# Altium PCB uz_frontpanel_buttonboard.PcbDoc
Units mm, origin at the board's own origin, x right, y up, seen from the top; angles counter-clockwise.
Board outline 41 x 105.16 mm, 2 copper layers (Top Layer, Bottom Layer), stack 1.569 mm thick; 8 components, 15 nets, 32 pads, 0 vias.
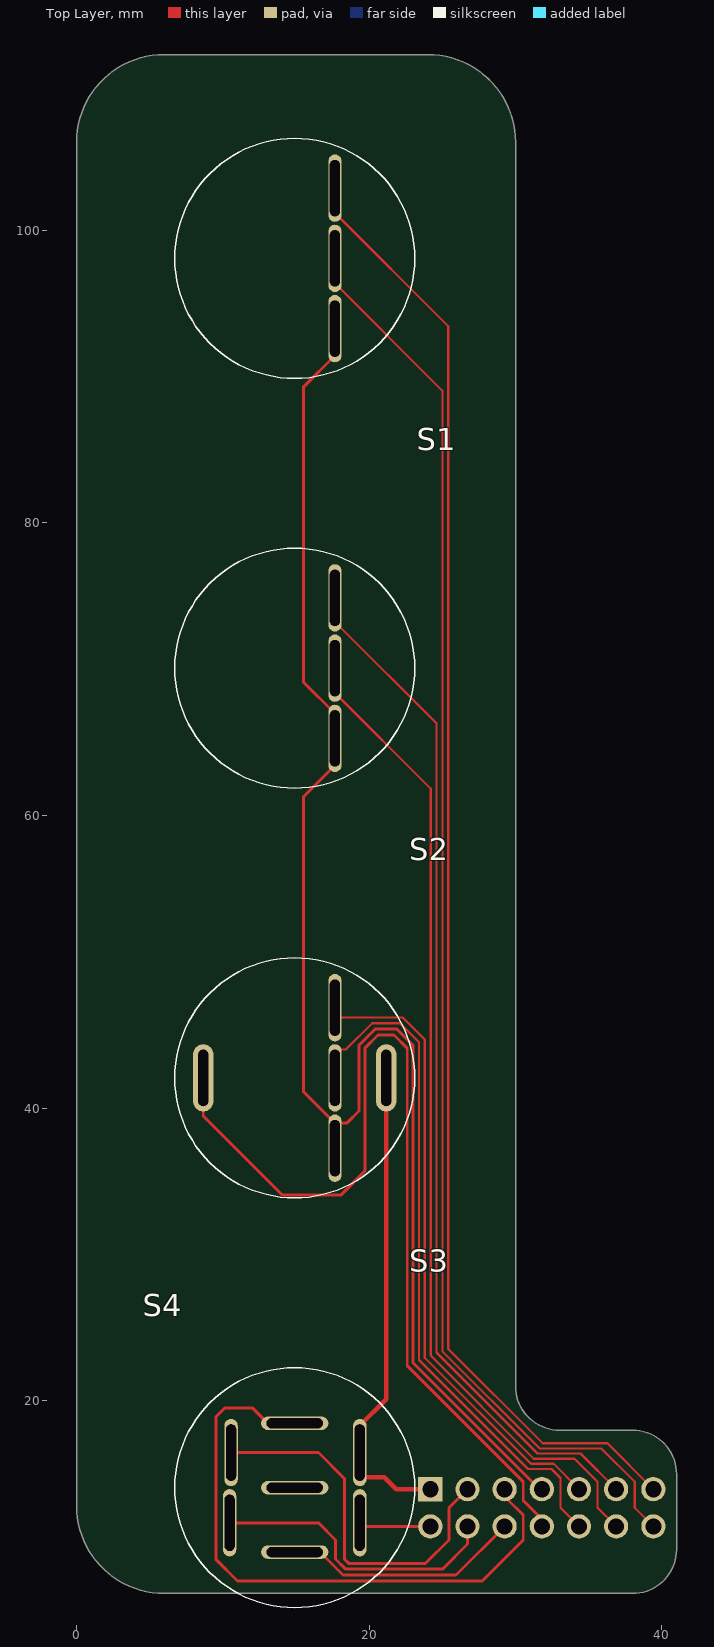
[diagram p0: Top Layer view]
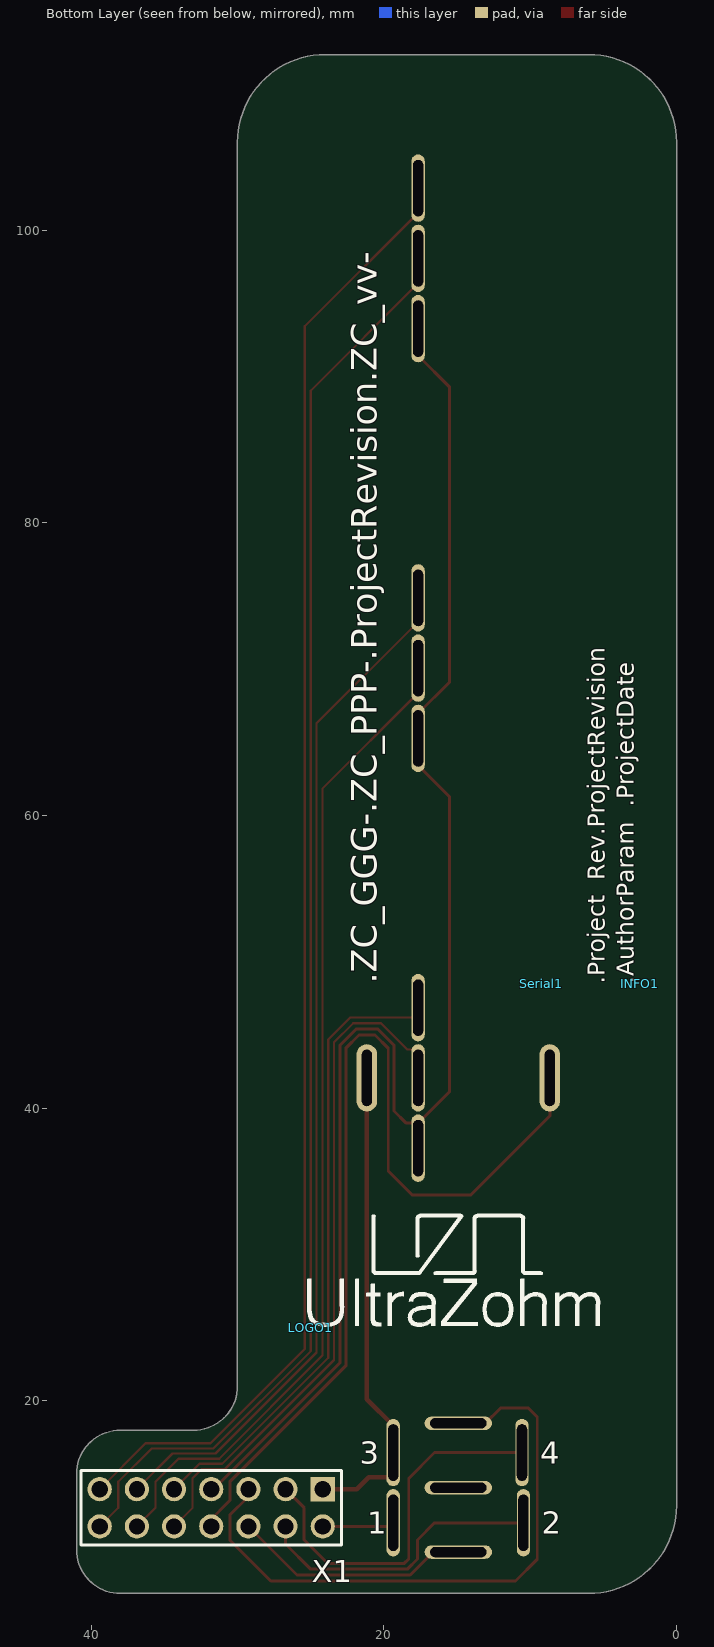
[diagram p1: Bottom Layer view, seen from below]

## Layer stack, top to bottom
Top Solder: solder mask 0.0254, SM-001, Dk 4
Top Layer: signal copper 0.035
Dielectric 1: core 1.4986, Core-043, Dk 4.3
Bottom Layer: signal copper 0.035
Bottom Solder: solder mask 0.0254, SM-001, Dk 4

## Board outline
0,12.84 0,25 0,106 cw(c6,106) 6,112 24,112 cw(c24,106) 30,106 30,21 ccw(c33,21) 33,18 38,18 cw(c38,15) 41,15 41,9.84 cw(c38,9.84) 38,6.84 6,6.84 cw(c6,12.84)

## Design rules (kind name [scope] priority, off if disabled: settings)
AssemblyTestPointUsage [InNetClass('3V3_SingleEnded') or InNetClass('5V_SingleEnded') or InNetClass('15V_SingleEnded') or InNetClass('DifferentialSignals')] p1:
BoardOutlineClearance [All] p1: gap=0.5 ignorepadtopadclearanceinfootprint=FALSE except(0: Arc-SplitContinuation Track-SplitContinuation SMDPad-SplitContinuation THPad-SplitContinuation Via-SplitContinuation Fill-SplitContinuation Poly-SplitContinuation Region-SplitContinuation Text-SplitContinuation)
Clearance [All] p1: gap=0.5 ignorepadtopadclearanceinfootprint=TRUE except(0.127: Arc-Arc Arc-Track Arc-SMDPad Arc-Fill Arc-Poly Arc-Region Track-Track SMDPad-SMDPad SMDPad-Fill SMDPad-Poly SMDPad-Region Fill-Fill Fill-Poly Fill-Region Poly-Region Region-Region; 0.2: Track-SMDPad Track-Fill Track-Poly Track-Region; 0.33: Arc-THPad Arc-Via Track-THPad Track-Via SMDPad-THPad SMDPad-Via Via-Fill Via-Poly Via-Region)
ComponentClearance [All] p1: gap=0.1 collisioncheckmode=3 verticalgap=0.1 showdistances=FALSE
FanoutControl Fanout_Power [InNetClass('Power') or InNet('ENABLE')] p1: bgadir=Out bgaviamode=Centered fanoutstyle=Auto fanoutdirection=None viagrid=0.025
FanoutControl Fanout_RS422 [InNetClass('DifferentialSignals')] p2: bgadir=Out bgaviamode=Closest fanoutstyle=Rows fanoutdirection=OutOnly viagrid=0.025
FanoutControl Fanout_BGA [IsBGA] p3 off: bgadir=Out bgaviamode=Centered fanoutstyle=Auto fanoutdirection=Alternating viagrid=0.025 // Fanout_BGA (Default Rule)
FanoutControl Fanout_LCC [IsLCC] p4 off: bgadir=Out bgaviamode=Centered fanoutstyle=Auto fanoutdirection=Alternating viagrid=0.025 // Fanout_LCC (Default Rule)
FanoutControl Fanout_SOIC [IsSOIC] p5 off: bgadir=Out bgaviamode=Centered fanoutstyle=Auto fanoutdirection=Alternating viagrid=0.025 // Fanout_SOIC (Default Rule)
FanoutControl Fanout_Small [(CompPinCount < 5)] p6 off: bgadir=Out bgaviamode=Centered fanoutstyle=Auto fanoutdirection=OutThenIn viagrid=0.025 // Fanout_Small (Default Rule)
FanoutControl Fanout_Default [All] p7: bgadir=NE bgaviamode=Closest fanoutstyle=Rows fanoutdirection=InOnly viagrid=0.025 // Fanout_Default (Default Rule)
Height [All] p1: minheight=0 maxheight=50 prefheight=12.7
HoleSize [All] p1: absolutevalues=TRUE maxlimit=4 minlimit=0.025 maxpercent=80.000 minpercent=20.000
PolygonConnect PolygonConnect_Therm [HoleSize > 2.6] p1: connectstyle=Direct reliefconductorwidth=0.254 reliefentries=4 polygonreliefangle="90 Angle" airgapwidth=0.254
PolygonConnect PolygonConnect_via [InPadClass('pad') or IsVia] p2: connectstyle=Direct reliefconductorwidth=0.254 reliefentries=4 polygonreliefangle="90 Angle" airgapwidth=0.254
PolygonConnect [All] p3: connectstyle=Relief reliefconductorwidth=0.3 reliefentries=4 polygonreliefangle="90 Angle" airgapwidth=0.25
RoutingLayers RoutingLayers_3V3Signals [InNetClass('3V3_SingleEnded')] p1 off: top layer_v5=TRUE bottom layer_v5=TRUE
RoutingLayers RoutingLayers_SingleEnded [InNetClass('15V_SingleEnded') or InNetClass('3V3_SingleEnded') or InNetClass('5V_SingleEnded')] p2 off: top layer_v5=TRUE bottom layer_v5=TRUE
RoutingLayers RoutingLayers_Differential [InNetClass('DifferentialSignals')] p3 off: top layer_v5=TRUE bottom layer_v5=FALSE
RoutingLayers [All] p4: top layer_v5=TRUE bottom layer_v5=TRUE
RoutingVias [All] p1: holewidth=0.3 width=0.5 viastyle="Through Hole" minholewidth=0.2 minwidth=0.4 maxholewidth=0.5 maxwidth=1
SolderMaskExpansion [All] p1: expansion=0.102 istentingtop=FALSE
UnRoutedNet UnRoutedNet_Signals [InNetClass('15V_SingleEnded') or InNetClass('3V3_SingleEnded') or InNetClass('5V_SingleEnded') or InNetClass('DifferentialSignals')] p1: checkbadconnections=TRUE
UnRoutedNet [All] p2: checkbadconnections=TRUE
Width [All] p1: maxlimit=10 minlimit=0.127 preferedwidth=0.3 minimp=50.000000 maximp=50.000000 favimp=50.000000
19 further rules are at their usual default settings.

## Components (designator, comment, footprint, x,y, rotation, side; value= is the part's Value field where it differs from the comment)
INFO1 "Design Information" Design_info2 2.5,48.5 r90 bottom
LOGO1 "UZ Logo" UZ_Logo_tiny 25,25 r180 bottom
S1 "P16-TF" P16-TF 14.91,98.07 r270 top
S2 "P16-TF" P16-TF 14.91,70.07 r270 top
S3 "P16-TF-R" P16-TF-R 14.91,42.07 r270 top
S4 "P16-TF-RGB" P16-TF-RGB 14.91,14.07 r0 top
Serial1 "ZC Serialnumber" ZC-Serial 9.25,48.5 r90 bottom value=GGG-PPP-VVvv
X1 "2.54-2*7P Pin Header" TSW-107-07-XXX-S 24.175,13.965 r0 bottom

## Footprints (in the part's own frame and the unit in brackets; to place one, negate y for a bottom-side part, rotate by r counter-clockwise, add the part's x,y. Pads: shape width x height; smd on the part's side, far side on the other; paste and mask are expansions set on the pad)
Design_info2 [mm] "project name + revision number"
P16-TF [mm]
  oval 4.6x0.916 hole 0.687 slot 3.844 at 0 deg: C(4.8,2.75) NC(-4.8,2.75) NO(0,2.75)
  silkscreen extent -8.2,-8.2 8.2,8.2, body extent -11.12,-9.25 10.82,9.75, height 5.25
P16-TF-R [mm]
  oval 4.6x1.4 hole 0.687 slot 3.844 at 0 deg: +(0,6.25) -(0,-6.25)
  oval 4.6x0.916 hole 0.687 slot 3.844 at 0 deg: C(4.8,2.75) NC(-4.8,2.75) NO(0,2.75)
  silkscreen extent -8.2,-8.2 8.2,8.2, body extent -10.97,-9.25 10.97,9.75, height 34
P16-TF-RGB [mm]
  oval 0.916x4.6 hole 0.687 slot 3.844 at 90 deg: 1(4.45,-2.4) 2(-4.45,-2.4) 3(4.45,2.4) 4(-4.35,2.4)
  oval 4.6x0.916 hole 0.687 slot 3.844 at 0 deg: C(0,-4.4) NC(0,4.4) NO(0,0)
  silkscreen extent -8.2,-8.2 8.2,8.2, body extent -9.5,-10.97 9.5,10.97, height 31.3
TSW-107-07-XXX-S [mm]
  rect 1.65x1.65 hole 1.1: 1(0,0)
  round 1.65 hole 1.1: 2(0,2.54) 3(2.54,0) 4(2.54,2.54) 5(5.08,0) 6(5.08,2.54) 7(7.62,0) 8(7.62,2.54) 9(10.16,0) 10(10.16,2.54) 11(12.7,0) 12(12.7,2.54) 13(15.24,0) 14(15.24,2.54)
  silkscreen extent -1.27,-1.27 16.51,3.81, body extent -1.27,-1.27 16.51,3.81, height 8.38
UZ_Logo_tiny [mm] "logo width 2cm"
  silkscreen extent -0.2,0.06 19.75,7.74
ZC-Serial [mm] "Serialnumber"

## Part data
INFO1: Manufacturer=UltraZohm, Supplier Part Number 1=-, Component Type="Design Information", ComponentLink1Description=https://docs.ultrazohm.com/, ComponentLink1URL=homepage, Created from=MGremer, Created On="03/11/2021 09:04:23", Last Updated="15/04/2025 09:29:36", Live Cycle Status=1, Manufacturer Part Number="Design Information", PartID=12, Supplier 1=-, Type="Design Information"
LOGO1: library part 1, "Official Project Logo of the UltraZohm", Manufacturer="PCB Manufacturer", Manufacturer Part Number="UltraZohm Logo", Component Type=Logo, ComponentLink1Description=Homepage, ComponentLink1URL=https://ultrazohm.com, Created from="T. Wendt", Created On="19.02.2021 16:55:56", Last Updated="02.03.2021 14:31:24", Live Cycle Status=1, PartID=1, Type="Standard (No BOM)"
S1 S2: "Stainless steel push botton 0.63 inch flat", Device Package=THT, Manufacturer=Metzler, Component Type="push button", ComponentLink1Description=Datasheet, ComponentLink1URL=https://www.led-taster.de/mediafiles/Sonstiges/Datenblatt_LED_Drucktaster_6-24V.pdf, ComponentLink2Description=Homepage, ComponentLink2URL=https://www.led-taster.de/Edelstahl-Drucktaster-O16mm-Flach, Created from=MGremer, Created On="02.03.2021 14:59:37", Last Updated="05.07.2024 11:31:32", Live Cycle Status=1, Manufacturer Part Number=P16-TF, Minimum Order=1, Mounting Type=THT, PartID=8, Stock number="not stored", Supplier 1=Metzler, Supplier Part Number 1=P16-TF, Type="push button"
S3: "Stainless steel push botton 0.63 inch flat LED Ring red", Device Package=THT, Manufacturer=Metzler, Component Type="LED push button", ComponentLink1Description=Datasheet, ComponentLink1URL=https://www.led-taster.de/mediafiles/Sonstiges/Datenblatt_LED_Drucktaster_6-24V.pdf, ComponentLink2Description=Homepage, ComponentLink2URL=https://www.led-taster.de/O16mm-flacher-Edelstahl-Taster-mit-roter-LED-Ringbeleuchtung, Created from=MGremer, Created On="02.03.2021 14:59:37", Last Updated="05.07.2024 11:31:32", Live Cycle Status=1, Manufacturer Part Number=P16-TF-R, Minimum Order=1, Mounting Type=THT, PartID=7, Stock number="not stored", Supplier 1=Metzler, Supplier Part Number 1=P16-TF-R, Type="LED push button red"
S4: "Push button momentary 16mm - LED Circular Illumination RGB - IP67 IK10 - Stainless steel - Flat - Soldering contacts", Device Package=THT, Manufacturer=Metzler, Component Type="LED push button", ComponentLink1Description=Datasheet, ComponentLink1URL=https://metzler-electronics.com/mediafiles/Sonstiges/Datenblatt/16/P16-TF-RGB.pdf, Created from=FRosner, Created On="03/07/2024 12:55:00", Last Updated="05/07/2024 15:40:05", Live Cycle Status=1, Manufacturer Part Number=P16-TF-RGB, Minimum Order=1, Mounting Type=THT, PartID=15, Stock number="not stored", Supplier 1=Metzler, Supplier Part Number 1=P16-TF-RGB, Type="LED push button RGB"
Serial1: library part ZC-Serial, Manufacturer=UltraZohm, Supplier Part Number 1=-, Component Type="ZC Serialnumber", ComponentLink1Description=https://docs.ultrazohm.com/, ComponentLink1URL=homepage, Created from=FRosner, Created On="15/04/2025 09:17:14", Last Updated="15/04/2025 09:17:14", Live Cycle Status=1, Manufacturer Part Number=ZC-Serial, PartID=58, Supplier 1=-, Type="Serial Number"
X1: "[low-cost] TSW-107-07-S-D Headers & Wire Housings Classic PCB Header Strips, 0.100\" pitch", LCSC Part Number=C71397, Manufacturer="Boom Precision Elec", Operating Temperature="-55 °C to +125 °C", ComponentLink1Description=Datasheet, ComponentLink1URL=https://www.lcsc.com/datasheet/lcsc_datasheet_2212121509_BOOMELE-Boom-Precision-Elec-2-54-2-7P_C71397.pdf, Created from=FRosner, Created On="03.09.2024 09:19:28", Last Updated="03.09.2024 09:26:45", Manufacturer Part Number="2.54-2*7P Pin Header", Mounting Type=THT, PartID=45, Supplier 1=LCSC, Supplier Part Number 1=C71397

## Nets (pads, with @x,y where several pads share a name; then routed paths per layer and width w, separated by ;. In a path a pad name is that pad's centre, name@x,y a point inside that pad or via, vN(x,y) a via of type N, cw(c..) or ccw(c..) an arc to the next point about the centre after c; other vN are vias at no path point)
S3C_BUTCOM: S4.C X1.6 | length 16.4
  Top Layer w0.2: S4.C 16.63,9.67 18.2,8.1 25.93,8.1 X1.6
S3C_Pwr_LEDb: S4.1 X1.2 | length 4.9
  Top Layer w0.2: S4.1 19.605,11.425 X1.2
S3C_Pwr_LEDg: S4.2 X1.4 | length 20.2
  Top Layer w0.2: S4.2 16.53,11.67 17.7,10.5 17.7,9.2 18.4,8.5 25,8.5 26.715,10.215 X1.4
S3C_Pwr_LEDr: S4.4 X1.3 | length 25.9
  Top Layer w0.2: S4.4 16.53,16.47 18.3,14.7 18.3,9.2 18.6,8.9 23.845,8.9 25.445,10.5 25.445,12.695 X1.3
S3C_Pwr_NC: S4.NC X1.5 | length 42
  Top Layer w0.2: S4.NC 13.068,18.47 12.038,19.5 10.117,19.5 9.517,18.9 9.517,9.183 11,7.7 27.725,7.7 30.525,10.5 30.525,12.195 X1.5@29.32,13.4
S3C_Pwr_NO: S4.NO
SOM_BUTCOM: S1.C S2.C S3.C X1.7 | length 104.9
  Top Layer w0.2: S3.C S3.C@17.66,38.669 ; S1.C 17.66,91.428 15.5,89.268 15.5,69.132 17.66,66.972 S2.C 17.66,63.428 15.5,61.268 15.5,41.132 17.66,38.972 S3.C@17.66,38.669 ; X1.7 31.635,13.965 23,22.6 23,44.3 21.9,45.4 20.4,45.4 19.3,44.3 19.3,39.8 18.5,39 17.991,39 S3.C@17.66,38.669
SOM_EnC_NC: S2.NC X1.11 | length 68.6
  Top Layer w0.15: S2.NC@17.894,73.006 24.6,66.3 24.6,23.3 31.5,16.4 34.44,16.4 X1.11
SOM_EnC_NO: S2.NO X1.12 | length 68.2
  Top Layer w0.15: S2.NO 17.66,68.368 24.2,61.828 24.2,23.1 31.25,16.05 34.025,16.05 35.605,14.47 35.605,12.695 X1.12
SOM_EnS_NC: S1.NC X1.13 | length 100.5
  Top Layer w0.15: S1.NC 17.66,101.168 25.4,93.428 25.4,23.55 31.85,17.1 36.28,17.1 X1.13
SOM_EnS_NO: S1.NO X1.14 | length 98.1
  Top Layer w0.15: S1.NO 17.66,96.368 25,89.028 25,23.4 31.65,16.75 35.865,16.75 38.145,14.47 38.145,12.695 X1.14
SOM_Stop_LED: S3.- X1.8 | length 64.7
  Top Layer w0.2: S3.- 8.66,39.47 14.047,34.083 18.083,34.083 19.7,35.7 19.7,44.1 20.6,45 21.7,45 22.6,44.1 22.6,22.4 30.525,14.475 30.525,13.195 X1.8@31.92,11.8
SOM_Stop_NC: S3.NC X1.9 | length 43.2
  Top Layer w0.15: S3.NC 17.66,46.531 17.991,46.2 22.3,46.2 23.8,44.7 23.8,22.95 31.05,15.7 32.6,15.7 X1.9
SOM_Stop_NO: S3.NO X1.10 | length 47.3
  Top Layer w0.15: S3.NO 17.66,43.687 17.991,44.018 18.418,44.018 20.2,45.8 22.1,45.8 23.4,44.5 23.4,22.8 30.85,15.35 32.45,15.35 33.065,14.735 33.065,12.695 X1.10
VIN: S3.+ S4.3 X1.1 | length 33
  Top Layer w0.3: S3.+ 21.16,20.112 19.36,18.312 S4.3 19.36,15.063 19.645,14.778 21.032,14.778 21.845,13.965 X1.1

## Silkscreen, mask and mechanical layers (free items; w line width, h text height)
Bottom Overlay:
  text "4" at 9.306,15.708 h1.52
  text "3" at 21.63,15.708 h1.52
  text "2" at 9.206,10.908 h1.52
  text "1" at 21.122,10.908 h1.52
Mechanical 1:
  lines w0.1: 138.141,0 ccw(c138.141,3) 141.141,3 ; 0,12.84 ccw(c6,12.84) 6,6.84 38,6.84 ccw(c38,9.84) 41,9.84 41,15 ccw(c38,15) 38,18 33,18 cw(c33,21) 30,21 30,106 ccw(c24,106) 24,112 6,112 ccw(c6,106) 0,106 0,25 0,12.84

## Dimensions
141.141,0 to 141.141,100 on Mechanical 2
146.143,97.802 to -14.84,72.216 on Mechanical 2
141.141,100 to -14.853,72.225 on Mechanical 2
141.141,100 to 0.031,100 on Mechanical 2